# Altium PCB PCB_Interface_Lio.PcbDoc
Units mm, origin at the board's own origin, x right, y up, seen from the top; angles counter-clockwise.
Board outline 75 x 58 mm, 4 copper layers (Top, Layer 2, Layer 3, Bottom Layer 1), stack 0.602 mm thick; 84 components, 48 nets, 226 pads, 112 vias.
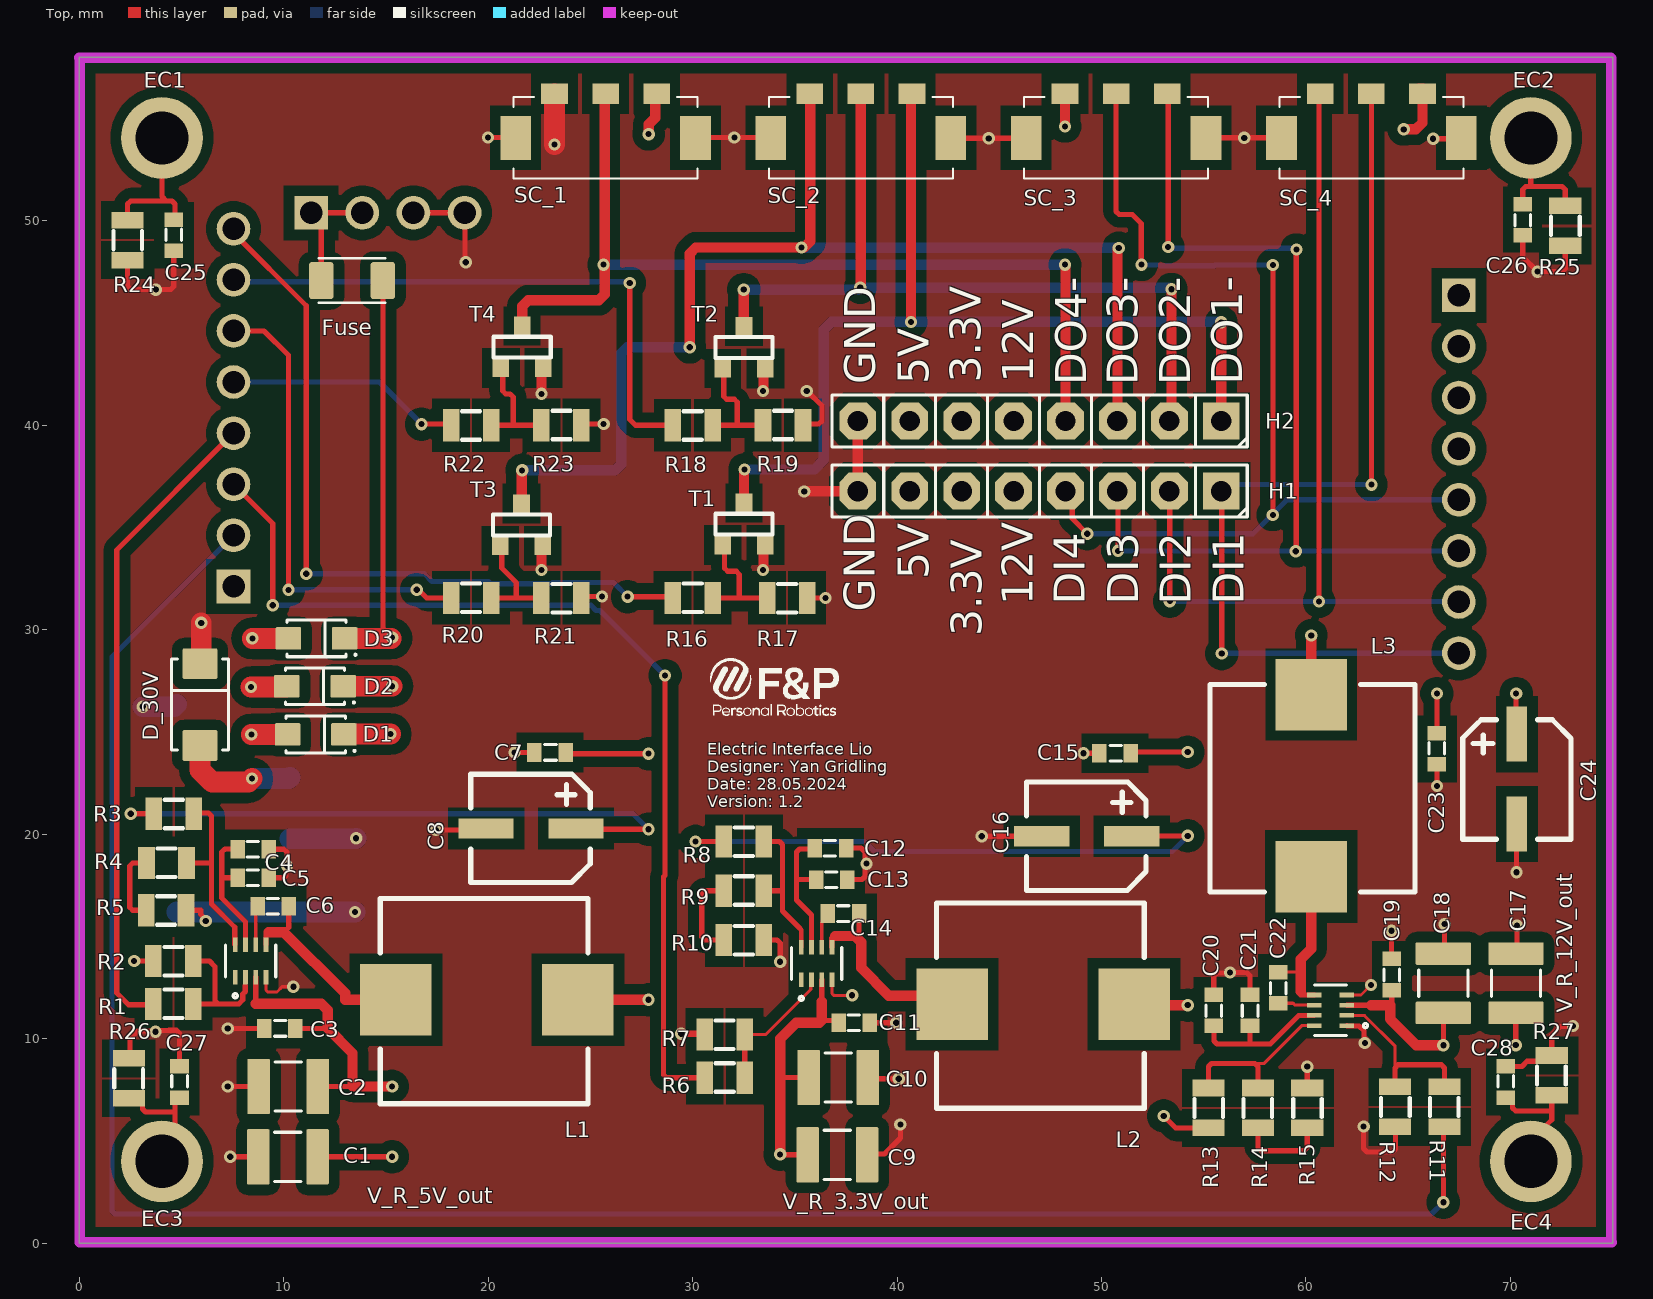
[diagram p0: Top view]
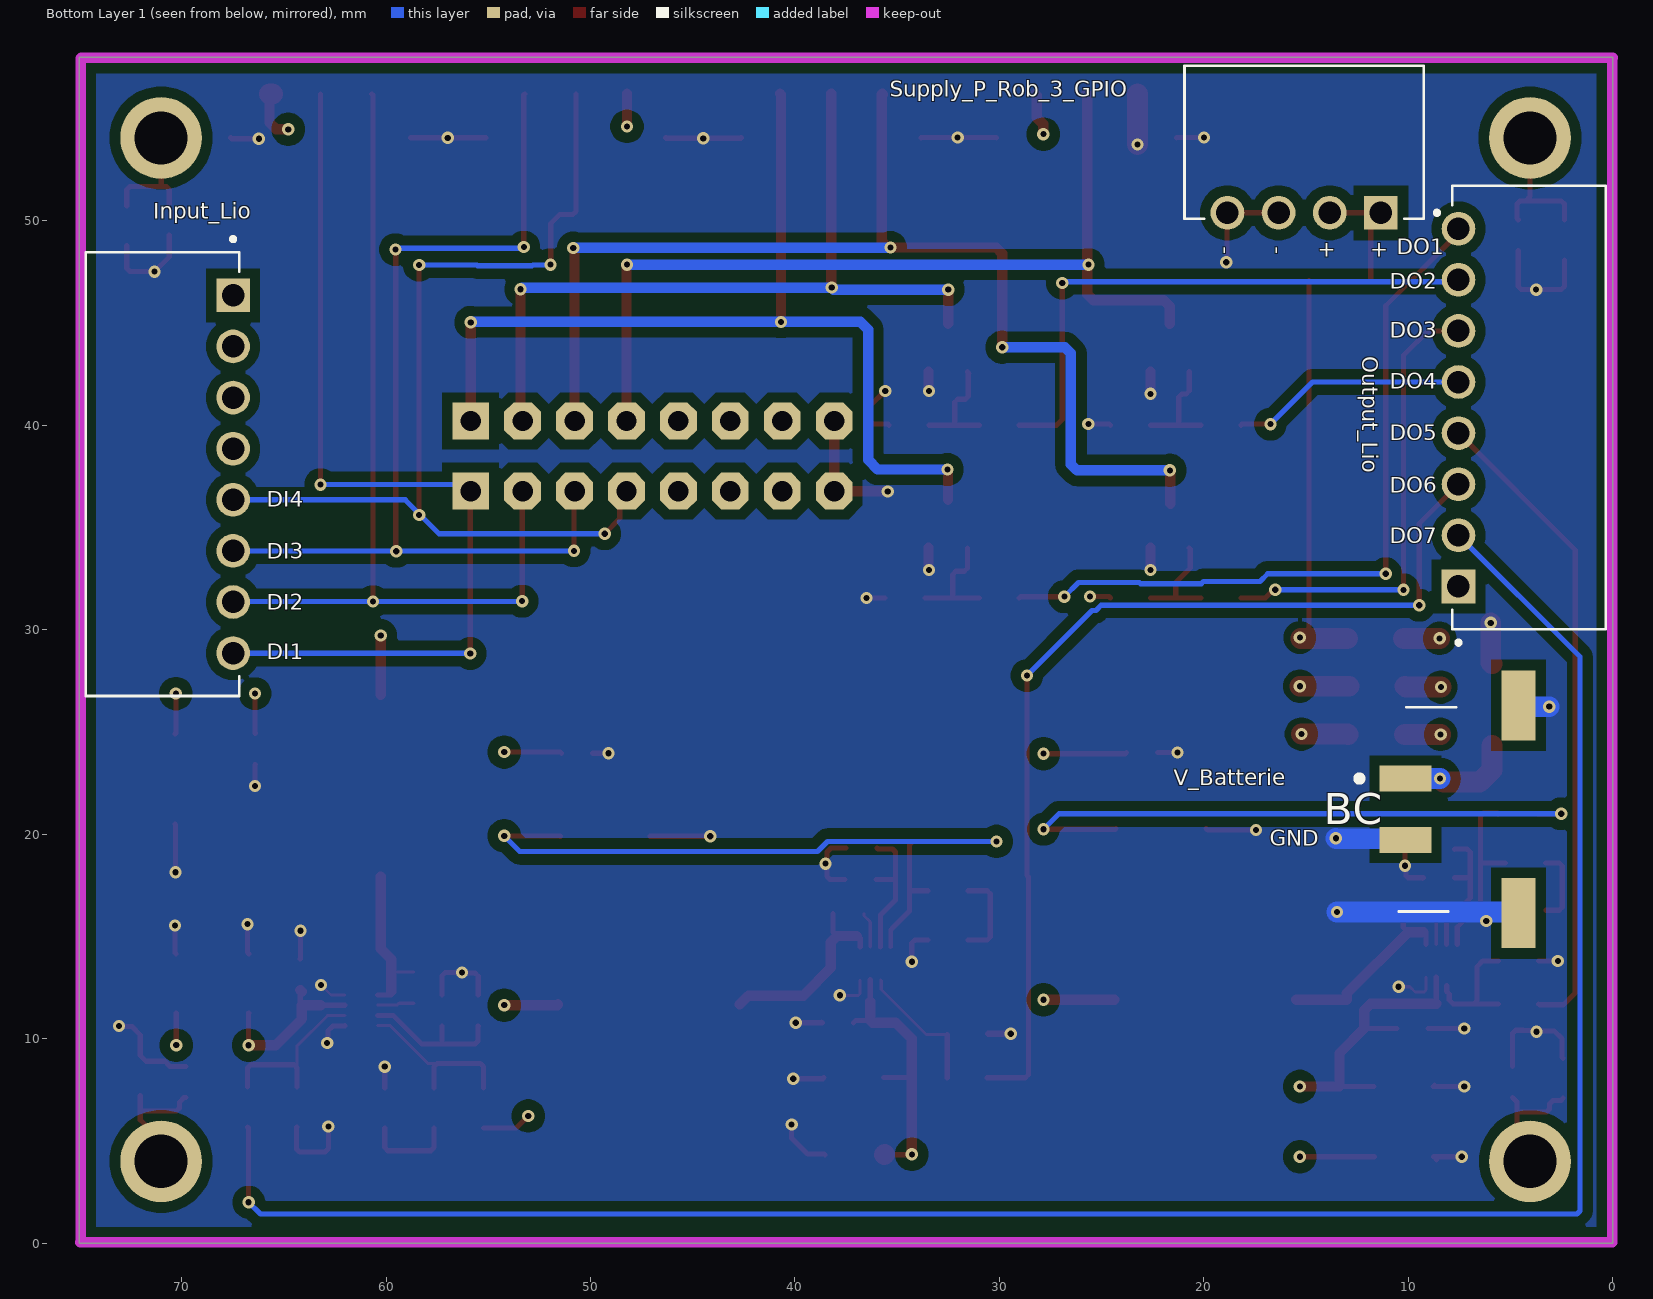
[diagram p1: Bottom Layer 1 view, seen from below]
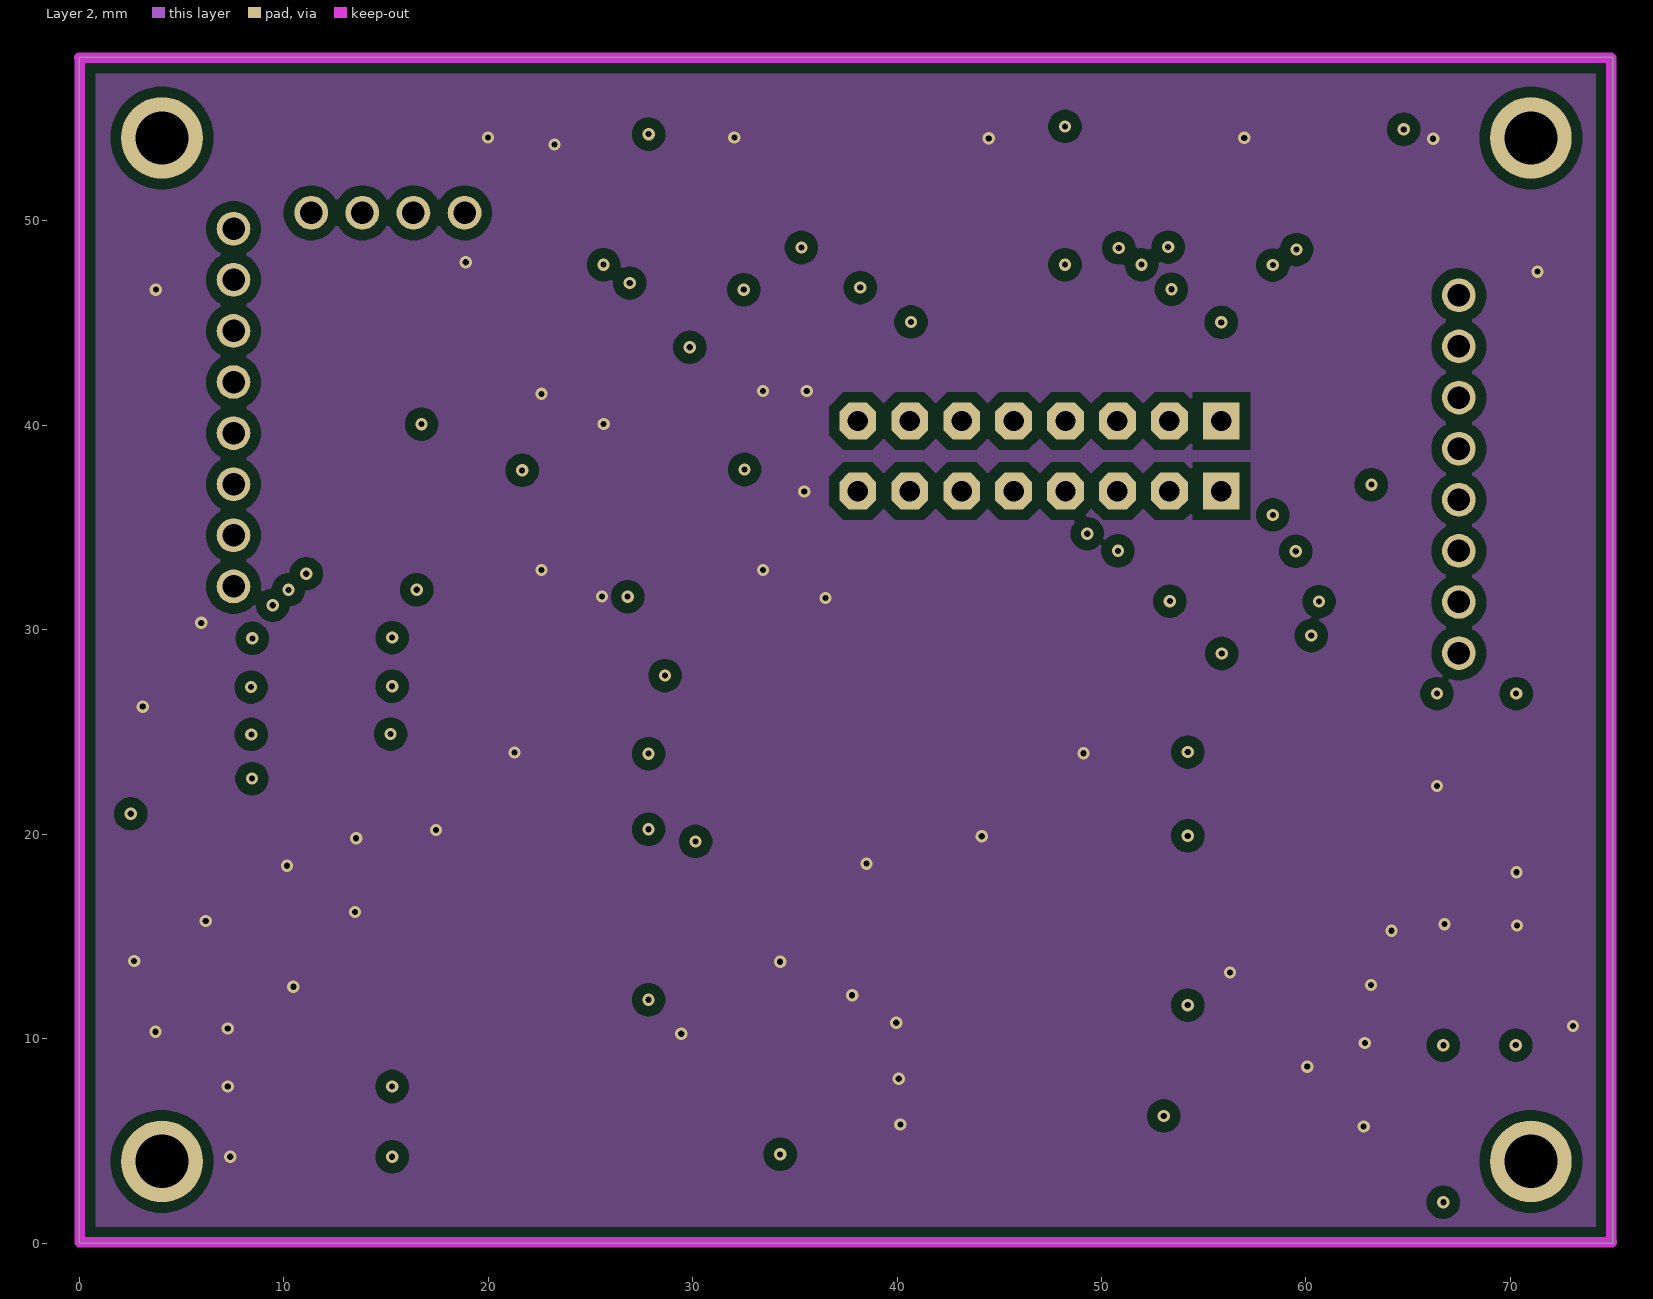
[diagram p2: Layer 2]
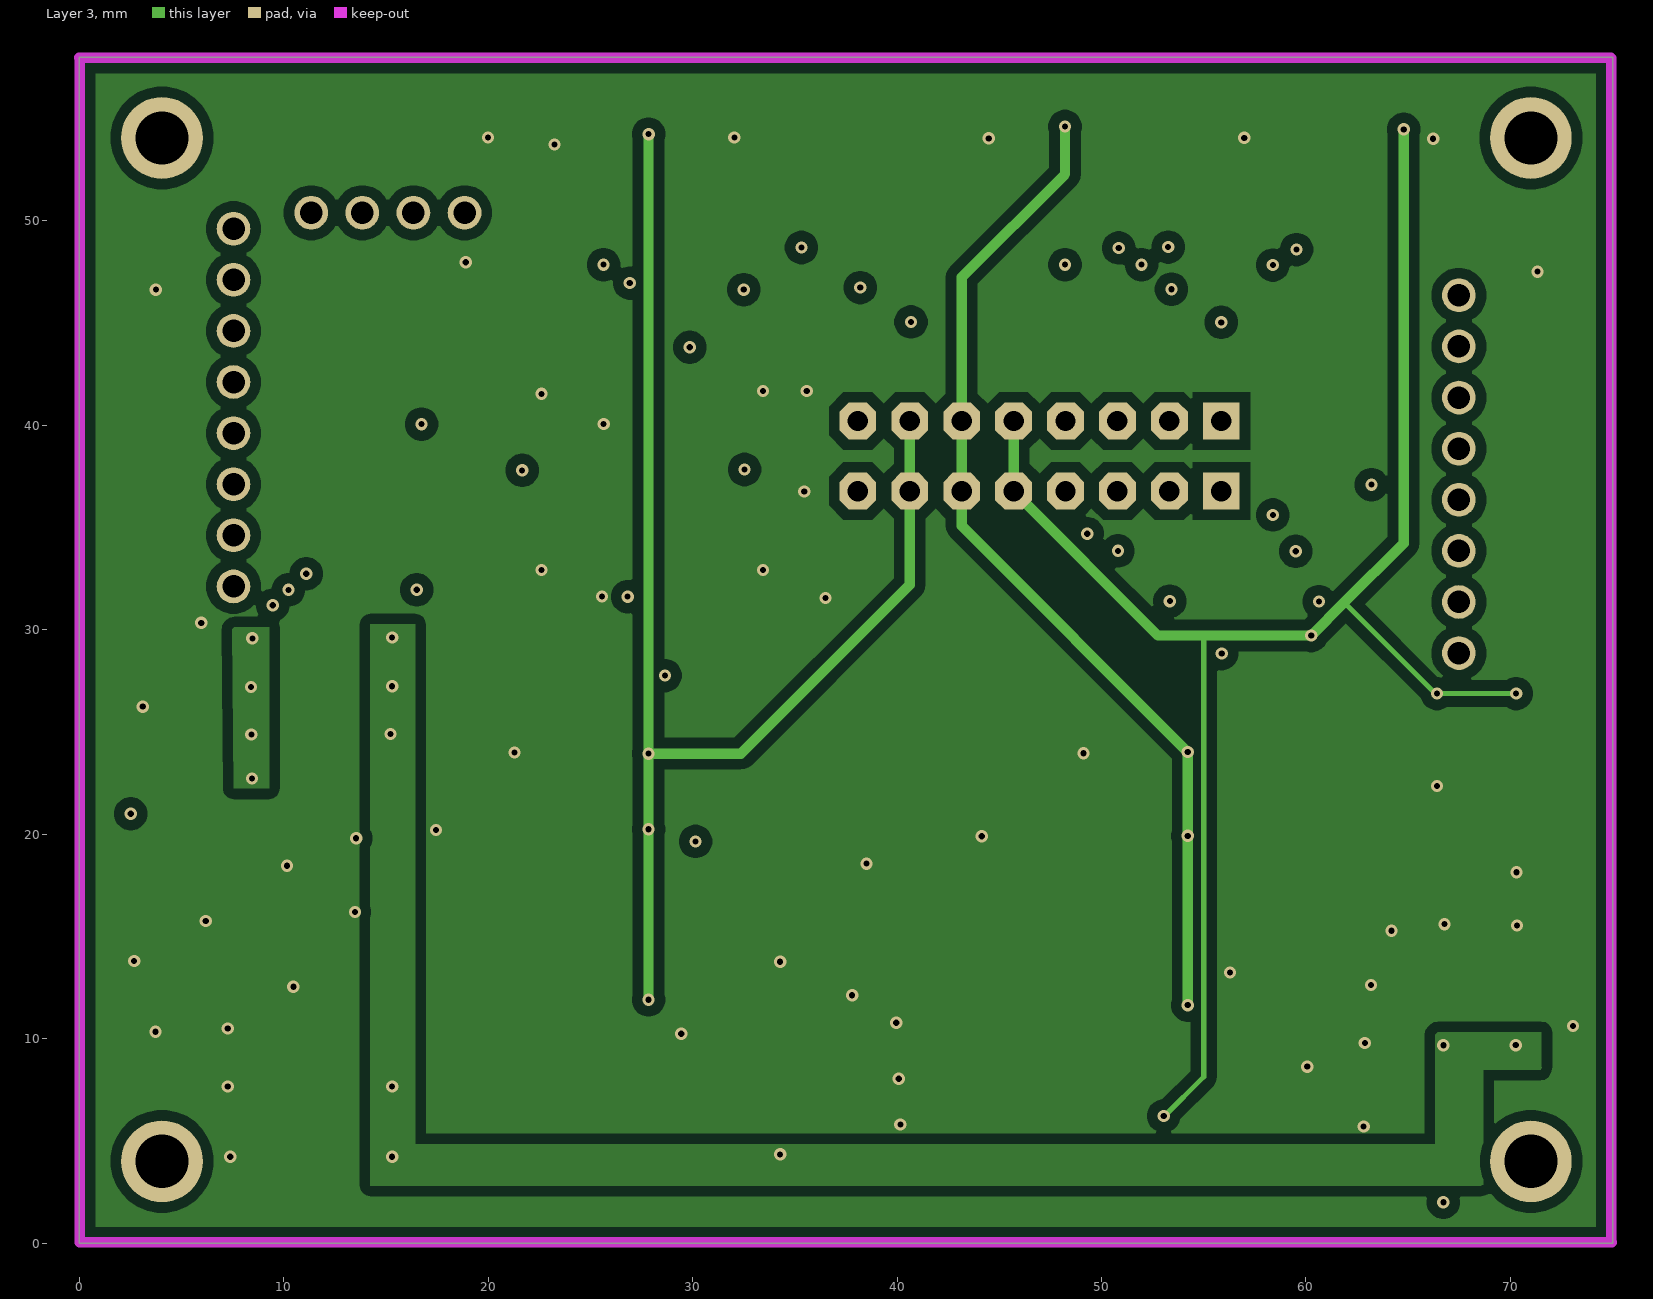
[diagram p3: Layer 3]
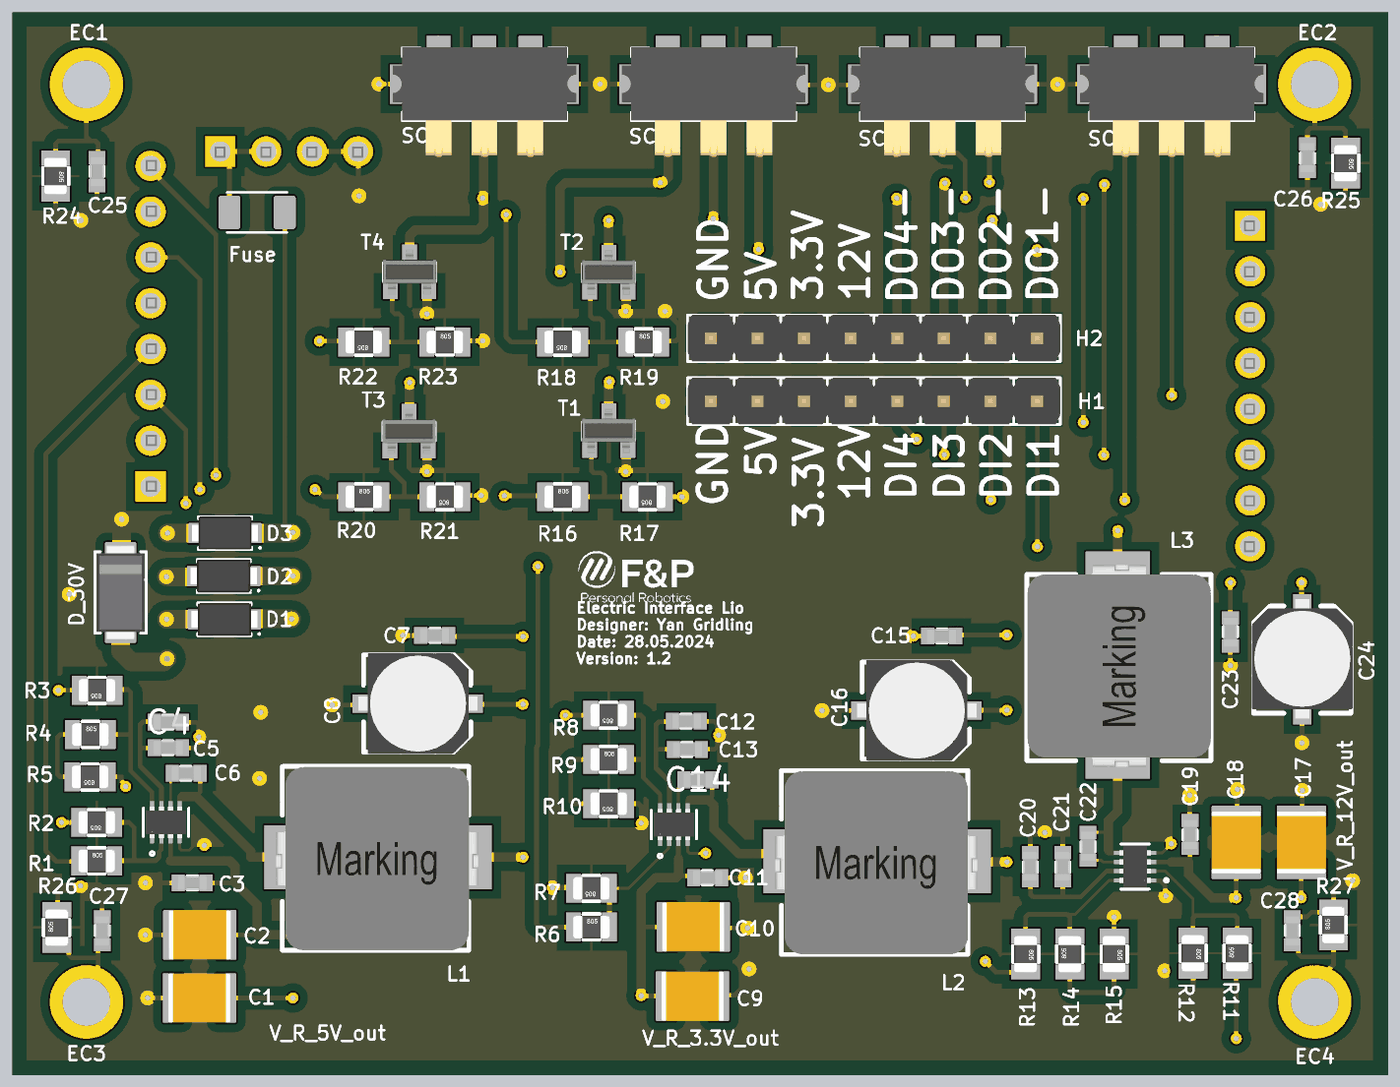
[diagram p4: 3D render of the assembled board from above, using the file's embedded part models]
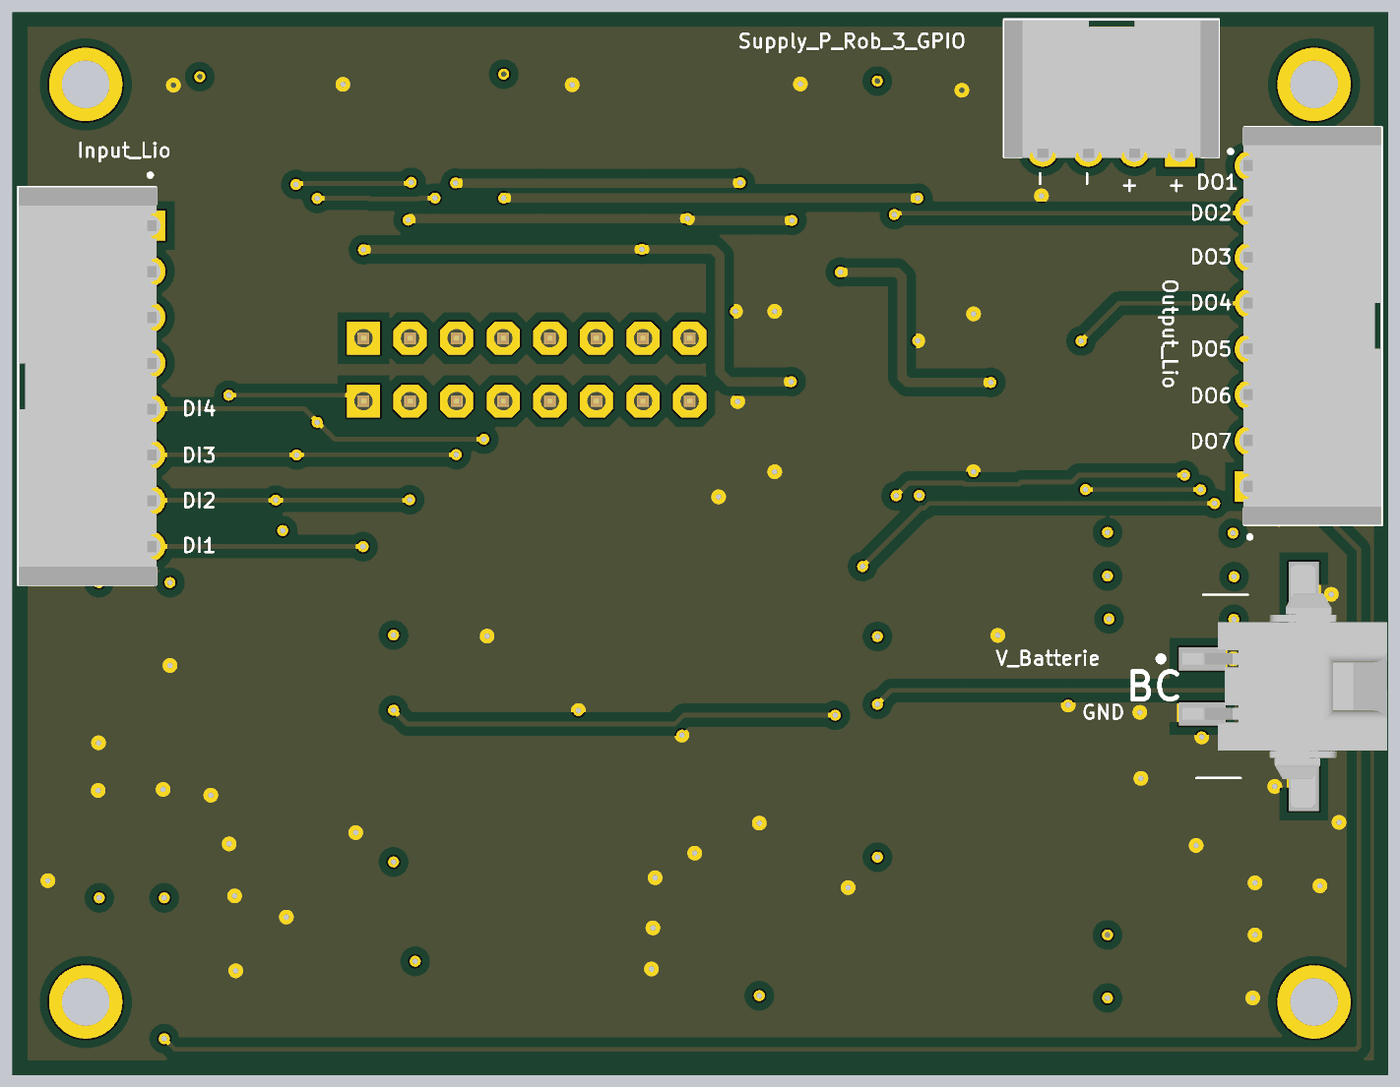
[diagram p5: 3D render of the assembled board from below, using the file's embedded part models]

## Layer stack, top to bottom
Top Solder: solder mask 0.0102, Solder Resist, Dk 3.5
Top: signal copper 0.035
Dielectric 2: prepreg 0.0711, PP-006, Dk 4.1
Layer 2: signal copper 0.035
Dielectric 1: dielectric 0.32, FR-4, Dk 4.8
Layer 3: signal copper 0.035
Dielectric 3: prepreg 0.0711, PP-006, Dk 4.1
Bottom Layer 1: signal copper 0.035
Bottom Solder: solder mask 0.0102, Solder Resist, Dk 3.5

## Board outline
0,0 75,0 75,58 0,58

## Design rules (kind name [scope] priority, off if disabled: settings)
Clearance Clearance_poly [(InPoly)] p1: gap=0.508 ignorepadtopadclearanceinfootprint=FALSE
Clearance Clearance_IC [IsPad AND HasFootprint('LM3150') OR IsPad AND HasFootprint('TSSOP14') OR IsPad AND HasFootprint('LQFP48') OR IsPad AND HasFootprint('SOT363') OR IsPad AND HasFootprint('SOT563') OR IsPad AND  HasFootprint('LQFP64') OR IsPad AND  HasFootprint('MSOP-8') OR IsPad AND HasFootprint('MEC6-130-02-L-D-RA1')] p2: gap=0.152 ignorepadtopadclearanceinfootprint=FALSE
Clearance [All] p3: gap=0.254 ignorepadtopadclearanceinfootprint=FALSE except(0: Arc-Hole Track-Hole SMDPad-Hole THPad-Hole Via-Hole Fill-Hole Poly-Hole Region-Hole Text-Hole)
ComponentClearance [All] p1: gap=0.508 collisioncheckmode=3 verticalgap=0.254 showdistances=FALSE
Height [All] p1: minheight=0 maxheight=38.1 prefheight=25.4
HoleSize [All] p1: absolutevalues=TRUE maxlimit=8.5 minlimit=0.3 maxpercent=80.000 minpercent=20.000
MinimumAnnularRing [All] p1: minimumring=0.15
MinimumSolderMaskSliver [All] p1: minsoldermaskwidth=0.051
PlaneClearance [All] p1: clearance=0.254
PolygonConnect PolygonConnect_via [All vs IsVIa] p1: connectstyle=Direct reliefconductorwidth=0.254 reliefentries=4 polygonreliefangle="90 Angle" airgapwidth=0.254
PolygonConnect [All] p2: connectstyle=NoConnect reliefconductorwidth=0.254 reliefentries=4 polygonreliefangle="90 Angle" airgapwidth=0.508
RoutingVias [All] p1: holewidth=0.3 width=0.5 viastyle="Through Hole" minholewidth=0.254 minwidth=0.381 maxholewidth=0.711 maxwidth=1.27
SilkToSolderMaskClearance SilkscreenOverComponentPads [IsPad] p1: minsilkscreentomaskgap=0 clearancetoexposedcopper=TRUE
SolderMaskExpansion SolderMaskExpansion_fid [HasFootprint('FIDUCIAL_RUND_1.524mm')] p1: expansion=2 istentingtop=FALSE
SolderMaskExpansion SolderMaskExpansion_Vias [(IsVia)] p2: expansion=-0.1 istentingtop=FALSE
SolderMaskExpansion [All] p3: expansion=0.102 istentingtop=FALSE
Width [All] p1: maxlimit=1.016 minlimit=0.152 preferedwidth=0.254 minimp=50.000000 maximp=50.000000 favimp=50.000000
24 further rules are at their usual default settings.

## Components (designator, comment, footprint, x,y, rotation, side; value= is the part's Value field where it differs from the comment)
BC "2-1445100-2" 2-1445100-2 8.537,21.22 r90 bottom
C1 "C 10uF 1210" C_1210_A 10.2,4.22 r180 top value=10uF
C2 "C 10uF 1210" C_1210_A 10.22,7.66 r180 top value=10uF
C3 "C 100nF 0603" 0603 9.8,10.5 r180 top value=100nF
C4 "C 10nF 0603" 0603 8.503,19.265 r0 top value=10nF
C5 "C 10nF 0603" 0603 8.503,17.868 r0 top value=10nF
C6 "C 100nF 0603" 0603 9.48,16.48 r0 top value=100nF
C7 "C 100nF 0603" 0603 23.02,24 r180 top value=100nF
C8 "C 47uF ALUM" HA1C470WR 22.092,20.281 r90 top value=47uF
C9 "C 10uF 1210" C_1210_A 37.08,4.32 r0 top value=10uF
C10 "C 10uF 1210" C_1210_A 37.12,8.1 r0 top value=10uF
C11 "C 100nF 0603" 0603 37.9,10.78 r0 top value=100nF
C12 "C 10nF 0603" 0603 36.74,19.32 r0 top value=10nF
C13 "C 10nF 0603" 0603 36.8,17.78 r0 top value=10nF
C14 "C 100nF 0603" 0603 37.38,16.12 r0 top value=100nF
C15 "C 100nF 0603" 0603 50.66,23.96 r180 top value=100nF
C16 "C 47uF ALUM" HA1C470WR 49.28,19.9 r90 top value=47uF
C17 "C 10uF 1210" C_1210_A 70.274,12.707 r90 top value=10uF
C18 "C 10uF 1210" C_1210_A 66.718,12.707 r90 top value=10uF
C19 "C 100nF 0603" 0603 64.2,13.14 r90 top value=100nF
C20 "C 10nF 0603" 0603 55.488,11.387 r90 top value=10nF
C21 "C 10nF 0603" 0603 57.266,11.387 r90 top value=10nF
C22 "C 100nF 0603" 0603 58.64,12.492 r90 top value=100nF
C23 "C 100nF 0603" 0603 66.4,24.18 r270 top value=100nF
C24 "C 47uF ALUM" HA1C470WR 70.32,22.7 r180 top value=47uF
C25 "C 1uF 0603" 0603 4.62,49.3 r270 top value=1uF
C26 "C 1uF 0603" 0603 70.6,50.06 r90 top value=1uF
C27 "C 1uF 0603" 0603 4.9,7.88 r270 top value=1uF
C28 "C 1uF 0603" 0603 69.78,7.88 r270 top value=1uF
D1 "Schottky 60V/2A" SOD-123FL 11.56,24.88 r180 top
D2 "Schottky 60V/2A" SOD-123FL 11.525,27.24 r180 top
D3 "Schottky 60V/2A" SOD-123FL 11.6,29.58 r180 top
D_30V "SMAJ30CA" SMA 5.9,26.34 r270 top
EC1 "Screw_Earth_Connection" Screw_Earth_Connector_Pad#1 2.008,53.806 r0 top
EC2 "Screw_Earth_Connection" Screw_Earth_Connector_Pad#1 68.968,53.806 r0 top
EC3 "Screw_Earth_Connection" Screw_Earth_Connector_Pad#1 2.008,3.746 r0 top
EC4 "Screw_Earth_Connection" Screw_Earth_Connector_Pad#2 69.028,3.766 r0 top
Fuse "0ZCJ0035AF2E" RESC3216X125N 13.34,47.08 r180 top
H1 "8Pin_Male" Header1x8_254 46.968,36.784 r180 top
H2 "8Pin_Male" Header1x8_254 46.968,40.213 r180 top
Input_Lio "1814906" PHOENIX_1814906 74.68,48.46 r270 bottom
L1 "L 6.8uH 13A" SRP1040VA-6R8M 19.933,11.899 r0 top
L2 "L 6.8uH 13A" SRP1040VA-6R8M 47.14,11.68 r0 top
L3 "L 6.8uH 13A" SRP1040VA-6R8M 60.26,22.38 r90 top
Output_Lio "1814906" PHOENIX_1814906 0.34,30.02 r90 bottom
R1 "R 330K 0805" 0805 4.6,11.7 r0 top value=330k
R2 "R 56K 0805" 0805 4.6,13.8 r180 top value=56k
R3 "R 47K 0805" 0805 4.618,21 r180 top value=47k
R4 "R 6K8 0805" 0805 4.26,18.59 r0 top value=6.8k
R5 "R 2K2 0805" 0805 4.24,16.28 r180 top value=2.2k
R6 "R 330K 0805" 0805 31.568,8.089 r0 top value=330k
R7 "R 56K 0805" 0805 31.56,10.2 r180 top value=56k
R8 "R 22K 0805" 0805 32.506,19.646 r180 top value=22k
R9 "R 5K6 0805" 0805 32.506,17.233 r0 top value=5.6k
R10 "R 1K5 0805" 0805 32.506,14.82 r180 top value=1.5k
R11 "R 330K 0805" 0805 66.775,6.66 r90 top value=330k
R12 "R 56K 0805" 0805 64.362,6.66 r270 top value=56k
R13 "R 100K 0805" 0805 55.234,6.611 r270 top value=100k
R14 "R 5K6 0805" 0805 57.647,6.611 r90 top value=5.6k
R15 "R 1K5 0805" 0805 60.06,6.611 r270 top value=1.5k
R16 "R 330K 0805" 0805 30,31.56 r0 top value=330k
R17 "R 330K 0805" 0805 34.62,31.56 r180 top value=330k
R18 "R 330K 0805" 0805 30,40.005 r180 top value=330k
R19 "R 330K 0805" 0805 34.42,40.005 r0 top value=330k
R20 "R 330K 0805" 0805 19.16,31.56 r0 top value=330k
R21 "R 330K 0805" 0805 23.58,31.56 r180 top value=330k
R22 "R 330K 0805" 0805 19.16,40.005 r180 top value=330k
R23 "R 330K 0805" 0805 23.58,40.005 r0 top value=330k
R24 "R 1M 0805" 0805 2.36,49.06 r270 top value=1M
R25 "R 1M 0805" 0805 72.68,49.76 r270 top value=1M
R26 "R 1M 0805" 0805 2.42,8.06 r90 top value=1M
R27 "R 1M 0805" 0805 72.02,8.2 r90 top value=1M
SC_1 "009155003541006" 009155003541006 25.74,53.14 r0 top
SC_2 "009155003541006" 009155003541006 38.227,53.14 r0 top
SC_3 "009155003541006" 009155003541006 50.713,53.14 r0 top
SC_4 "009155003541006" 009155003541006 63.2,53.14 r0 top
Supply_P_Rob_3_GPIO "1814867" PHOENIX_1814867 9.24,57.6 r0 bottom
T1 "PMV45EN" SOT-23-FET 32.513,35.18 r0 top
T2 "PMV45EN" SOT-23-FET 32.513,43.82 r0 top
T3 "PMV45EN" SOT-23-FET 21.626,35.14 r0 top
T4 "PMV45EN" SOT-23-FET 21.657,43.84 r0 top
V_R_3.3V_out "TPS62933ODRLR" SOT5X3-8_DRL_TEX 36.062,13.677 r90 top
V_R_5V_out "TPS62933ODRLR" SOT5X3-8_DRL_TEX 8.376,13.804 r90 top
V_R_12V_out "TPS62933ODRLR" SOT5X3-8_DRL_TEX 61.203,11.387 r180 top

## Footprints (in the part's own frame and the unit in brackets; to place one, negate y for a bottom-side part, rotate by r counter-clockwise, add the part's x,y. Pads: shape width x height; smd on the part's side, far side on the other; paste and mask are expansions set on the pad)
2-1445100-2 [mm]
  rect 1.27x2.54 smd: 1(1.5,1.6) 2(-1.5,1.6)
  rect 3.43x1.65 smd: 3(5.08,-3.937) 4(-5.08,-3.937)
  silkscreen extent -5,-0.88 5,4, body extent -6.63,-8.49 6.63,2.67, height 5.63
0603 [mil]
  rect 28x36 smd: 1(-30,0) 2(30,0)
  silkscreen extent -12,-15 10,15, body extent -31,-16 32,16, height 12
0805 [mil]
  rect 32x62 smd: 1(-38.5,0) 2(38.5,0)
  silkscreen extent -18,-27 18,28, body extent -39,-25 39,25, height 31
009155003541006 [mm]
  rect 1.3x1 smd: 1(-2.5,3.075) 2(0,3.075) 3(2.5,3.075)
  rect 1.5x2.15 smd: 4(-4.4,0.925) 5(4.4,0.925)
  silkscreen extent -4.5,-1.07 4.5,2.93, body extent -5,-3.05 5,3.45, height 3.8
C_1210_A [mm] "Chip Capacitor, 2-Leads, Body 3.20x2.50mm, IPC High Density"
  rrect10% 1.1x2.7 smd: 1(-1.45,0) 2(1.45,0)
  silkscreen extent -0.65,-1.2 0.65,1.2, body extent -1.7,-1.35 1.7,1.35, height 1.35
HA1C470WR [mm] "PCE4190TR-ND"
  rect 1x2.7 smd: 1(0,-2.2) 2(0,2.2)
  silkscreen extent -2.65,-2.9 2.65,2.95, body extent -2.76,-3.28 2.76,3.23, height 6.15
Header1x8_254 [mm]
  rect 1.8x1.8 hole 1: 1(-8.89,0)
  oct 1.8x1.8 hole 1: 2(-6.35,0) 3(-3.81,0) 4(-1.27,0) 5(1.27,0) 6(3.81,0) 7(6.35,0) 8(8.89,0)
  silkscreen extent -10.16,-1.27 10.16,1.27, body extent -10.16,-1.27 10.16,1.27, height 8.57
PHOENIX_1814867 [mm]
  rect 1.65x1.65 / inner round 1.65 / far side rect 1.65x1.65 hole 1.1: 01(2.1,7.2)
  round 1.65 hole 1.1: 02(4.6,7.2) 03(7.1,7.2) 04(9.6,7.2)
  silkscreen extent -0.75,0 11.7,7.5, body extent -0.02,0.04 11.68,7.83, height 5
PHOENIX_1814906 [mm]
  rect 1.65x1.65 / inner round 1.65 / far side rect 1.65x1.65 hole 1.1: 01(2.1,7.2)
  round 1.65 hole 1.1: 02(4.6,7.2) 03(7.1,7.2) 04(9.6,7.2) 05(12.1,7.2) 06(14.6,7.2) 07(17.1,7.2) 08(19.6,7.2)
  silkscreen extent -0.75,0 21.7,7.5, body extent 0.02,0.04 21.72,7.83, height 5
RESC3216X125N [mm]
  rrect25% 1.2x1.82 smd: 1(-1.505,0) 2(1.505,0)
  silkscreen extent -1.63,-1.09 1.63,1.09
Screw_Earth_Connector_Pad#1 [mm]
  round 4 hole 2.6: 4(2.032,0.254)
Screw_Earth_Connector_Pad#2 [mm]
  round 4 hole 2.6: 4(1.972,0.234)
SMA [mm] "SODFL, 2-Leads, Body 2,67x5,10mm"
  rrect10% 1.5x1.7 smd: A(2,0) K(-2,0)
  silkscreen extent -2.22,-1.4 2.22,1.4, body extent -2.6,-1.3 2.6,1.3, height 2.4
SOD-123FL [mm] "SODFL, 2-Leads, Body 1.65x3.60mm, IPC High Density"
  rrect10% 1.25x1.1 smd: A(1.375,0) K(-1.375,0)
  silkscreen extent -1.95,-0.9 1.45,0.9, body extent -1.8,-0.9 1.8,0.9, height 0.98
SOT5X3-8_DRL_TEX [mil]
  rect 28x9 smd paste+0 mask+0: 1(-31.5,29.54) 2(-31.5,9.85) 3(-31.5,-9.84) 4(-31.5,-29.53) 5(31.5,-29.53) 6(31.5,-9.84) 7(31.5,9.85) 8(31.5,29.54)
  silkscreen extent -71,-48 31,48, body extent -34,-44 34,44, height 24
SOT-23-FET [mil]
  rect 32x36 smd: D(0,40.5) G(-41,-40.5) S(41,-40.5)
  silkscreen extent -55,-20 55,20, body extent -57,-49 58,48, height 39
SRP1040VA-6R8M [mm]
  rect 3.5x3.5 smd: 1(-4.45,0) 2(4.45,0)
  silkscreen extent -5.21,-5.08 4.95,4.95, body extent -5.54,-5.08 5.46,4.92, height 3.81

## Part data
BC: "Micro MATE-N-LOK 2 Position Surface Mount Single Row Straight 3 mm Pin Header", Package=None, Availability=Warning, Check_prices=https://www.snapeda.com/parts/2-1445053-2/TE%20Connectivity%20AMP%20Connectors/view-part/2550164/?ref=eda, MF="TE Connectivity", MP=2-1445053-2, Price=None, Purchase-URL=https://pricing.snapeda.com/search/part/2-1445053-2/?ref=eda, SnapEDA_Link=https://www.snapeda.com/parts/2-1445053-2/TE%20Connectivity%20AMP%20Connectors/view-part/2550164/?ref=snap
C1 C2 C9 C10 C17 C18: library part C_10uF_1210, Supplier Part Number 1=445-7004-1-ND, TempKoeff=X7S, Tolerance=10%, Voltage=50V, Part ID=C_10uF_1210, Price 1pc (CHF)=0.81, Supplier 1=Digi-Key
C3 C6 C7 C11 C14 C15 C19 C22 C23: library part C_100nF_0603, Supplier Part Number 1=1276-1012-1-ND, TempKoeff=Y5V, Tolerance=-20%/+80%, Voltage=50V, Part ID=C_100nF_0603, Price 1pc (CHF)=0.1, Supplier 1=Digi-Key
C4 C5 C12 C13 C20 C21: library part C_10000pF_0603, Supplier Part Number 1=1276-1009-1-ND, TempKoeff=X7R, Tolerance=10%, Voltage=50V, Part ID=C_10000pF_0603, Price 1pc (CHF)=0.10, Supplier 1=Digi-Key
C8 C16 C24: library part C_47uF_ALUM, Supplier Part Number 1=PCE4190TR-ND, Tolerance=20%, Voltage=16V, Part ID=C_47uF_ALUM, Price 1pc (CHF)=0.08, Supplier 1=Digi-Key
C25 C26 C27 C28: library part C_1uF_0603, Supplier Part Number 1=1276-6617-1-ND, TempKoeff=X7R, Tolerance=10%, Voltage=25V, Part ID=C_1uF_0603, Price 1pc (CHF)=0.29, Supplier 1=Digi-Key
D1 D2 D3: library part D_NTS260ESF, Current=2A, Forward Voltage=550mV@2A, Supplier Part Number 1=RBR2MM60CTR-ND, Voltage=60V, ComponentLink1Description=Datasheet, ComponentLink1URL=https://www.onsemi.com/pub/Collateral/NTS260ESF-D.PDF, Part ID=D_NTS260ESF, Price 10pcs=0.364, Supplier 1=Digi-Key
D_30V: library part D_SMAJ30CA, "Cera Diode 30 Volt Overvoltage protection.", Current=4.1A, Supplier Part Number 1=SMAJ30CALFCT-ND, Voltage=30V, ComponentLink1Description=Datasheet, ComponentLink1URL=https://www.littelfuse.com/~/media/electronics/datasheets/tvs_diodes/littelfuse_tvs_diode_smaj_datasheet.pdf.pdf, Part ID=D_SMAJ30CA, Price 10pcs=0.357, Supplier 1=Digi-Key
Fuse: "1206 SMT PPTC", Package="1206 Bel Fuse", ComponentLink1Description=https://www.mouser.ch/ProductDetail/Bel-Fuse/0ZCJ0035AF2E?qs=SRYZG9HaIQ1eeV%2FMwyYkuw%3D%3D, MF="Bel Fuse", MP=0ZCJ0035AF2E, SnapEDA_Link=https://www.snapeda.com/parts/0ZCJ0035AF2E/Bel%20Fuse%20Inc./view-part/703881/?ref=snap
H1 H2: library part ArduinoConnector_8, Supplier Part Number 1=732-5321-ND, ComponentLink1Description=Datasheet, ComponentLink1URL=https://katalog.we-online.de/em/datasheet/6130xx11121.pdf, Part ID=ArduinoConnector_8, Price 1pc (CHF)=0.36, Supplier 1=Digi-Key
Input_Lio Output_Lio: Package=None, Availability=Unavailable, ComponentLink1Description=https://www.phoenixcontact.com/en-us/products/pcb-header-ptsm-05-8-hh-25-thr-wh-r44-1814906, MF="{'manufacturer': u'Phoenix Contact'}", MP=1814906, Price=None
L1 L2 L3: library part SRP1040VA-6R8M, ComponentLink1Description=https://www.bourns.com/docs/product-datasheets/srp1040va.pdf
R1 R6 R11 R16 R17 R18 R19 R20 R21 R22 R23: library part R_330k_0805, Power Dissipation=125mW, Supplier Part Number 1=311-330KCRCT-ND, Tolerance=1%, Part ID=R_330k_0805, Price 10pcs (CHF)=0.042, Supplier 1=Digi-Key
R2 R7 R12: library part R_56k_0805, Power Dissipation=125mW, Supplier Part Number 1=311-56.0KCRCT-ND, Tolerance=1%, Part ID=R_56k_0805, Price 10pcs (CHF)=0.045, Supplier 1=Digi-Key
R3: library part R_47k_0805, Power Dissipation=125mW, Supplier Part Number 1=A106064CT-ND, Tolerance=1%, Part ID=R_47k_0805, Price 10pcs (CHF)=0.09, Supplier 1=Digi-Key
R4: library part R_6k8_0805, Power Dissipation=125mW, Supplier Part Number 1=A126384CT-ND, Tolerance=1%, Part ID=R_6k8_0805, Price 10pcs (CHF)=0.068, Supplier 1=Digi-Key
R5: library part R_2k2_0805, Power Dissipation=125mW, Supplier Part Number 1=311-2.20KCRCT-ND, Tolerance=1%, Part ID=R_2k2_0805, Price 10pcs (CHF)=0.043, Supplier 1=Digi-Key
R8: library part R_22k_0805, Power Dissipation=125mW, Supplier Part Number 1=311-22.0KCRCT-ND, Tolerance=1%, Part ID=R_22k_0805, Price 10pcs (CHF)=0.042, Supplier 1=Digi-Key
R9 R14: library part R_5k6_0805, Power Dissipation=125mW, Supplier Part Number 1=A126380CT-ND, Tolerance=1%, Part ID=R_5k6_0805, Price 10pcs (CHF)=0.051, Supplier 1=Digi-Key
R10 R15: library part R_1k5_0805, Power Dissipation=250mW, Supplier Part Number 1=RNCP0805FTD1K50CT-ND, Tolerance=1%, Part ID=R_1k5_0805, Price 10pcs (CHF)=0.072, Supplier 1=Digi-Key
R13: library part R_100k_0805, Power Dissipation=125mW, Supplier Part Number 1=311-100KCRCT-ND, Tolerance=1%, Part ID=R_100k_0805, Price 10pcs (CHF)=0.042, Supplier 1=Digi-Key
R24 R25 R26 R27: library part R_1M_0805, Power Dissipation=125mW, Supplier Part Number 1=311-1.00MCRCT-ND, Tolerance=1%, Part ID=R_1M_0805, Price 10pcs (CHF)=0.042, Supplier 1=Digi-Key
SC_1 SC_2 SC_3 SC_4: "Connector", Manufacturer_Name="Kyocera AVX", Mouser Part Number=581-009155003541006, Arrow Part Number=009155003541006, Arrow Price/Stock=https://www.arrow.com/en/products/009155003541006/avx, Datasheet Link=http://www.mouser.com/datasheet/2/40/RightAngle2.5mmPitch_9155-500-845733.pdf, Height=4mm, Manufacturer_Part_Number=009155003541006, Mouser Price/Stock=https://www.mouser.co.uk/ProductDetail/AVX/009155003541006?qs=aTQdX%252BfNGTp5QwJ6nid1rw%3D%3D
Supply_P_Rob_3_GPIO: "Pluggable Header 2.5mm 20AWG 160V 6A 4 Position COMBICON PTSM Series", Package=None, Check_prices=https://www.snapeda.com/parts/1814867/Phoenix+Contact/view-part/?ref=eda, ComponentLink1Description=https://www.phoenixcontact.com/en-us/products/pcb-header-ptsm-05-4-hh-25-thr-wh-r32-1814867, MF="Phoenix Contact", MP=1814867, SnapEDA_Link=https://www.snapeda.com/parts/1814867/Phoenix+Contact/view-part/?ref=snap
T1 T2 T3 T4: library part FET_N_CH_PMV45EN, Current=4.1A, Power Dissipation=510mW, Supplier Part Number 1=1727-2307-1-ND, Voltage=30V, ComponentLink1Description=Datasheet, ComponentLink1URL=https://assets.nexperia.com/documents/data-sheet/PMV45EN2.pdf, Part ID=FET_N_CH_PMV45EN, Price 1pc (CHF)=0.44, Supplier 1=Digi-Key
V_R_3.3V_out V_R_5V_out V_R_12V_out: "Buck Converter", ComponentLink1Description=https://eu.mouser.com/ProductDetail/Texas-Instruments/TPS62933ODRLR?qs=By6Nw2ByBD3VuSv7z7GudQ%3D%3D

## Via types
v1: diameter 0.6, hole 0.3, Top to Bottom Layer 1, 112 vias

## Nets (pads, with @x,y where several pads share a name; then routed paths per layer and width w, separated by ;. In a path a pad name is that pad's centre, name@x,y a point inside that pad or via, vN(x,y) a via of type N, cw(c..) or ccw(c..) an arc to the next point about the centre after c; other vN are vias at no path point)
3.3VDC: C15.1 C16.1 H1.6 H2.6 L2.2 R8.2 SC_3.1 | length 85.5
  Top w0.254: v1(30.14,19.646) R8.2 ; C15.1 51.482,24.02 v1(54.22,24.02) ; C16.1 51.5,19.92 v1(54.22,19.92)
  Top w0.508: v1(48.213,54.62) SC_3.1 ; L2.2 51.63,11.64 v1(54.22,11.64)
  Layer 3 w0.508: v1(48.213,54.62) 48.213,52.293 43.158,47.238 H2.6 H1.6 43.158,35.082 v1(54.22,24.02) v1(54.22,19.92) v1(54.22,11.64)
  Bottom Layer 1 w0.254: v1(30.14,19.646) 38.406,19.646 38.892,19.16 53.46,19.16 v1(54.22,19.92)
5VDC: C7.1 C8.1 H1.7 H2.7 L1.2 R3.2 SC_1.3 | length 106.6
  Top w0.254: v1(2.51,21) R3.2 ; C7.1 23.842,23.94 v1(27.84,23.94) ; C8.1 24.333,20.24 v1(27.84,20.24)
  Top w0.508: L1.2 L1.2 v1(27.84,11.9) ; v1(27.845,54.245) 27.845,54.725 28.16,55.04 28.16,56.135 SC_1.3
  Layer 3 w0.508: v1(27.84,11.9) v1(27.84,20.24) v1(27.84,23.94) ; v1(27.845,54.245) 27.84,54.24 v1(27.84,23.94) ; H2.7 H1.7 40.618,32.198 32.36,23.94 v1(27.84,23.94)
  Bottom Layer 1 w0.254: v1(2.51,21) 27.08,21 v1(27.84,20.24)
12VDC: C23.1 C24.1 H1.5 H2.5 L3.2 R13.2 SC_4.3 | length 94
  Top w0.254: v1(53.04,6.22) 53.627,5.633 R13.2 ; C23.1 66.405,24.947 v1(66.405,26.88) ; v1(70.28,26.88) 70.28,24.94 C24.1
  Top w0.508: L3.2 v1(60.26,29.72) ; v1(64.78,54.48) 65.38,54.48 65.7,54.8 SC_4.3
  Top w1.016: SC_4.3@65.558,56.207 65.566,56.215 SC_4.3
  Layer 3 w0.254: v1@53.08,6.22 55,8.14 55,29.72 ; 61.88,31.34 61.88,31.32 66.32,26.88 v1(66.405,26.88) v1(70.28,26.88)
  Layer 3 w0.508: H2.5 H1.5 52.762,29.72 55,29.72 v1(60.26,29.72) 61.88,31.34 64.78,34.24 v1(64.78,54.48)
GND: BC.2 BC.3 BC.4 C1.2 C2.2 C3.2 C4.2 C5.2 C7.2 C8.2 C9.2 C10.2 C11.2 C12.2 C13.2 C15.2 C16.2 C17.2 C18.2 C19.2 C20.2 C21.2 C23.2 C24.2 C25.2 C26.1 C27.1 C28.1 D_30V.K H1.8 H2.8 R2.2 R5.1 R7.2 R10.1 R12.2 R15.1 R17.1 R19.2 R21.1 R23.2 R24.2 R25.2 R26.2 R27.2 SC_1.1 SC_1.4 SC_1.5 SC_2.4 SC_2.5 SC_3.4 SC_3.5 SC_4.4 SC_4.5 Supply_P_Rob_3_GPIO.03 Supply_P_Rob_3_GPIO.04 T1.S T2.S T3.S T4.S V_R_3.3V_out.4 V_R_5V_out.4 V_R_12V_out.1 V_R_12V_out.4 | length 125.5
  Top w0.152: V_R_5V_out.4 9.126,12.373 9.215,12.284 9.666,12.284 9.922,12.54 v1(10.467,12.54) ; R7.2@30.542,10.24 R7.2 ; V_R_3.3V_out.4 36.812,12.205 36.901,12.115 37.795,12.115 v1(37.8,12.12) ; V_R_12V_out.4 62.691,12.137 v1(63.18,12.626)
  Top w0.254: R24.2 2.36,46.789 2.509,46.64 v1(3.74,46.64) 4.471,46.64 4.62,46.789 C25.2 ; R26.2 2.48,9.098 2.48,10 2.853,10.373 3.039,10.373 3.687,10.373 v1(3.72,10.34) 3.786,10.406 4.388,10.406 4.39,10.409 4.751,10.409 4.9,10.26 C27.1 ; v1(2.68,13.8) R2.2 ; R5.1@5.218,16.039 R5.1 5.94,16.28 5.94,16.067 6.18,15.827 v1(6.18,15.76) ; v1(7.258,7.66) C2.2 C2.2@8.71,7.72 ; v1@7.271,10.486 v1(7.258,10.5) C3.2 ; v1(7.38,4.22) C1.2 C1.2@8.61,4.08 ; C4.2 10.011,19.265 10.16,19.116 v1(10.16,18.46) 10.113,18.413 10.113,17.97 10.011,17.868 C5.2 C5.2@9.293,17.84 ; Supply_P_Rob_3_GPIO.03 Supply_P_Rob_3_GPIO.04 18.87,50.37 18.87,48.01 v1(18.9,47.98) ; v1(17.44,20.204) 19.815,20.204 C8.2 ; v1(19.985,54.08) 21.325,54.08 SC_1.4 ; v1(21.28,24) C7.2 ; R21.1 24.63,31.632 v1(25.559,31.632) ; R23.2 24.624,40.071 v1(25.644,40.071) ; SC_1.5 30.155,54.08 33.812,54.08 SC_2.4 ; R10.1 34.131,14.82 34.28,14.671 v1(34.28,13.76) ; R19.2 35.453,40.06 36.171,40.06 36.32,40.209 36.32,40.96 35.6,41.68 v1(35.58,41.68) ; R17.1 v1(36.5,31.56) ; C12.2 38.239,19.32 38.434,19.125 38.434,18.626 v1(38.5,18.56) 38.434,18.494 38.434,17.934 38.28,17.78 C13.2 ; C9.2 38.57,4.36 39.38,4.36 40.16,5.14 v1(40.16,5.8) ; C10.2 38.63,8.04 v1(40.08,8.04) ; C11.2@38.702,10.82 C11.2 v1(39.96,10.78) ; SC_2.5 42.652,54.04 v1(44.48,54.04) 46.288,54.04 SC_3.4 ; v1(44.14,19.9) C16.2 ; v1(49.12,23.96) C15.2 ; SC_3.5 SC_4.4 ; C20.2 55.488,13.051 55.649,13.212 56.252,13.212 v1(56.28,13.24) 57.1,13.24 57.266,13.074 C21.2 ; R15.1 v1(60.06,8.631) ; V_R_12V_out.1 62.016,10.624 62.596,10.624 62.833,10.387 62.833,9.833 v1(62.88,9.786) ; v1(62.82,5.7) 62.82,4.629 62.989,4.46 64.231,4.46 64.38,4.609 64.38,5.664 R12.2 ; v1(64.18,15.28) 64.18,13.922 C19.2 ; v1(66.22,54.02) 67.555,54.02 SC_4.5 ; C23.2 66.405,23.413 v1(66.405,22.36) ; C18.2 66.78,14.219 v1(66.78,15.6) ; C28.1 70.562,8.642 70.818,8.898 71.741,8.898 R27.2 72.02,10.18 72.429,10.589 73.029,10.589 v1(73.06,10.62) ; C17.2 70.32,14.203 v1(70.32,15.54) ; v1(70.3,18.14) 70.3,20.48 C24.2 ; C26.1 70.6,48.24 v1(71.32,47.52) 72.531,47.52 72.68,47.669 R25.2
  Top w0.304: v1(29.44,10.24) R7.2@30.542,10.24
  Top w0.508: v1(22.602,41.54) 22.607,41.545 T4.S@22.607,42.625 ; v1(22.607,32.929) T3.S@22.607,34.004 ; v1(33.44,32.929) 33.463,32.952 T1.S@33.463,34.004 ; v1(33.44,41.68) 33.463,41.703 T2.S@33.463,42.625 ; v1(35.46,36.76) 35.484,36.784 H1.8 H2.8
  Top w1.016: D_30V.K 5.96,28.4 v1(5.96,30.338) ; v1(23.24,53.74) SC_1.1
  Bottom Layer 1 w1.016: v1(3.1,26.24) 4.643,26.24 BC.3@4.763,26.36 ; BC.4@4.763,16.2 v1(13.48,16.2) ; BC.2@10.3,19.78 13.52,19.78 v1(13.54,19.8)
  other v1: 32.04,54.08 56.98,54.065
NetBC_1: BC.1 D1.A D2.A D3.A D_30V.A | length 11.2
  Top w1.016: D_30V.A 5.9,23.145 6.495,22.549 8.269,22.549 v1(8.44,22.72) ; v1(8.4,27.2) 10.11,27.2 D2.A ; v1(8.412,24.88) D1.A ; v1(8.46,29.58) D3.A
  Bottom Layer 1 w1.016: v1(8.44,22.72) 10.24,22.72 BC.1@10.3,22.78
NetC4_1: C4.1 C5.1 V_R_5V_out.7 | length 6.6
  Top w0.254: C5.1 6.968,17.868 ; C4.1 7.726,19.28 7.117,19.28 6.968,19.131 6.968,17.868 ; V_R_5V_out.7 8.126,15.72 6.968,16.878 6.968,17.868
NetC6_1: C6.1 V_R_5V_out.6 | length 1.9
  Top w0.152: V_R_5V_out.6 8.626,16.388 C6.1
NetC6_2: C6.2 L1.1 V_R_5V_out.5 | length 9.8
  Top w0.254: V_R_5V_out.5 9.126,15.214 ; 10.002,15.214 10.242,15.453 C6.2
  Top w0.508: 9.265,15.214 10.002,15.214 13.001,12.215 13.001,11.899 L1.1
NetC12_1: C12.1 C13.1 V_R_3.3V_out.7 | length 6.9
  Top w0.254: V_R_3.3V_out.7 35.817,14.482 35.817,16.043 35.08,16.78 35.08,17.78 ; C12.1 35.938,19.28 35.229,19.28 35.08,19.131 35.08,17.78 ; C13.1 35.08,17.78
NetC14_1: C14.1 V_R_3.3V_out.6 | length 1.8
  Top w0.152: V_R_3.3V_out.6 36.312,15.712 36.618,16.018 C14.1
NetC14_2: C14.2 L2.1 V_R_3.3V_out.5 | length 9.5
  Top w0.254: 36.807,14.92 36.807,14.482 V_R_3.3V_out.5 ; 37.942,15.02 38.142,15.22 C14.2
  Top w0.508: 36.96,15.02 37.942,15.02 38.24,14.722 38.24,13.46 39.6,12.1 42.27,12.1 L2.1
NetC20_1: C20.1 C21.1 V_R_12V_out.7 | length 7.2
  Top w0.254: C20.1 55.5,10.613 55.5,9.889 55.649,9.74 57.24,9.74 ; C21.1 57.266,9.766 57.24,9.74 ; V_R_12V_out.7 59.649,11.137 58.252,9.74 57.24,9.74
NetC22_1: C22.1 V_R_12V_out.6 | length 1.8
  Top w0.152: C22.1 59.373,11.73 59.465,11.637 V_R_12V_out.6
NetC22_2: C22.2 L3.1 V_R_12V_out.5 | length 7.6
  Top w0.152: C22.2 59.734,13.254 59.74,13.26
  Top w0.254: 59.74,12.137 V_R_12V_out.5
  Top w0.508: 59.74,12.32 59.74,13.26 59.74,13.88 60.26,14.4 L3.1
NetC25_1: C25.1 EC1.4 R24.1 | length 7.2
  Top w0.254: R24.1 2.36,50.831 2.509,50.98 4.249,50.98 ; EC1.4 4.04,51.189 4.249,50.98 ; C25.1 4.68,50.122 4.68,50.831 4.531,50.98 4.249,50.98
NetC26_2: C26.2 EC2.4 R25.1 | length 6.1
  Top w0.254: C26.2 70.6,51.53 70.749,51.679 71,51.679 ; EC2.4 71,51.679 ; R25.1 72.68,51.531 72.531,51.68 71.987,51.68 71.986,51.679 71,51.679
NetC27_2: C27.2 EC3.4 R26.1 | length 6.2
  Top w0.254: R26.1 2.529,6.973 2.91,6.973 3.08,6.803 3.08,6.56 3.229,6.412 4.68,6.412 ; EC3.4 4.68,4.64 4.68,6.412 ; C27.2 4.68,6.898 4.68,6.412
NetC28_2: C28.2 EC4.4 R27.1 | length 6.3
  Top w0.254: C28.2 69.882,7.118 70.11,6.889 70.11,6.609 70.259,6.46 72.02,6.46 ; EC4.4 71,5.014 72.02,6.034 72.02,6.46 ; R27.1 72.02,6.46
NetFuse_2: Fuse.2 Supply_P_Rob_3_GPIO.01 Supply_P_Rob_3_GPIO.02 | length 6
  Top w0.254: Fuse.2 11.835,49.905 Supply_P_Rob_3_GPIO.01 Supply_P_Rob_3_GPIO.02
NetH1_1: H1.1 Input_Lio.08 SC_4.2 | length 46.1
  Top w0.254: H1.1 55.88,36.762 v1(55.88,28.84) ; v1(63.2,37.1) SC_4.2
  Bottom Layer 1 w0.254: H1.1 56.174,37.1 v1(63.2,37.1) ; v1(55.88,28.84) 55.89,28.85 67.47,28.85 Input_Lio.08
NetH1_2: H1.2 Input_Lio.07 SC_4.1 | length 44.4
  Top w0.254: H1.2 53.34,36.762 v1(53.34,31.4) ; v1(60.64,31.38) 60.64,56.155 SC_4.1
  Bottom Layer 1 w0.254: v1(53.34,31.4) 53.36,31.38 v1(60.64,31.38) 67.46,31.38 Input_Lio.07
NetH1_3: H1.3 Input_Lio.06 SC_3.3 | length 48.2
  Top w0.254: H1.3 50.8,36.762 v1(50.8,33.86) ; SC_3.3 53.26,56.168 v1(53.26,48.72) ; v1(59.5,33.84) 59.52,33.86 59.52,48.58 v1(59.54,48.6)
  Bottom Layer 1 w0.254: v1(50.8,33.86) Input_Lio.06 ; v1(53.26,48.72) 53.32,48.66 59.48,48.66 v1(59.54,48.6)
NetH1_4: H1.4 Input_Lio.05 SC_3.2 | length 49.3
  Top w0.254: H1.4 48.564,36.458 48.564,35.436 v1(49.3,34.7) ; SC_3.2 50.713,50.469 50.862,50.32 51.5,50.32 51.94,49.88 51.94,47.88 v1(51.96,47.86) ; v1(58.38,35.62) v1(58.38,47.84)
  Bottom Layer 1 w0.254: v1(49.3,34.7) 57.404,34.7 59.064,36.36 Input_Lio.05 ; v1(51.96,47.86) 51.97,47.85 52.809,47.85 52.853,47.806 55.514,47.806 55.559,47.85 58.37,47.85 v1(58.38,47.84)
NetH2_1: H2.1 SC_2.3 T1.D | length 47.5
  Top w0.508: T1.D@32.513,36.354 32.513,37.813 v1(32.54,37.84) ; v1(40.68,45.06) 40.68,56.168 SC_2.3 ; H2.1 v1(55.858,45.04)
  Bottom Layer 1 w0.508: v1(32.54,37.84) 35.942,37.84 36.418,38.316 36.418,44.68 36.798,45.06 v1(40.68,45.06) 55.838,45.06 v1(55.858,45.04)
NetH2_2: H2.2 SC_2.2 T2.D | length 38.6
  Top w0.508: v1(32.5,46.64) 32.5,44.988 T2.D@32.513,44.975 ; v1(38.2,46.74) 38.227,46.767 SC_2.2 ; H2.2 53.42,40.315 v1(53.42,46.66)
  Bottom Layer 1 w0.508: v1(32.5,46.64) 38.1,46.64 v1(38.2,46.74) 53.34,46.74 v1(53.42,46.66)
NetH2_3: H2.3 SC_2.1 T3.D | length 57.5
  Top w0.508: T3.D 21.643,36.186 21.643,37.783 v1(21.66,37.8) ; v1(29.86,43.82) 29.86,48.402 30.158,48.7 v1(35.32,48.7) 35.462,48.7 35.76,48.998 35.76,56.182 SC_2.1 SC_2.1@35.7,56.188 ; H2.3 50.778,48.618 v1(50.84,48.68)
  Bottom Layer 1 w0.508: v1(21.66,37.8) 26.202,37.8 26.5,38.098 26.5,43.522 26.798,43.82 v1(29.86,43.82) ; v1(35.32,48.7) 35.34,48.68 v1(50.84,48.68)
NetH2_4: H2.4 SC_1.2 T4.D | length 45.2
  Top w0.508: T4.D@21.657,44.975 21.66,44.978 21.66,45.822 21.958,46.12 25.402,46.12 25.7,46.418 25.7,56.175 SC_1.2 ; v1(48.213,47.86) 48.238,47.835 H2.4
  Bottom Layer 1 w0.508: v1(25.64,47.86) v1(48.213,47.86)
NetOutput_Lio_02: Output_Lio.02 R11.1 | length 104.6
  Top w0.254: v1(66.72,2) 66.72,5.627 R11.1
  Bottom Layer 1 w0.254: Output_Lio.02 1.6,28.68 1.6,1.569 1.749,1.42 66.14,1.42 v1(66.72,2)
NetOutput_Lio_03: Output_Lio.03 R6.1 | length 49
  Top w0.254: Output_Lio.03 9.46,35.2 v1(9.46,31.2) ; v1(28.648,27.76) 28.648,17.986 28.58,17.918 28.58,8.238 28.729,8.089 R6.1
  Bottom Layer 1 w0.254: v1(9.46,31.2) 25.028,31.2 25.279,30.949 25.459,30.949 v1(28.648,27.76)
NetOutput_Lio_04: Output_Lio.04 R1.1 | length 31.8
  Top w0.254: R1.1 3.582,11.66 2.409,11.66 1.829,12.24 1.829,33.909 Output_Lio.04
NetOutput_Lio_05: Output_Lio.05 R22.2 | length 11.5
  Top w0.254: v1(16.74,40.06) 18.127,40.06 R22.2
  Bottom Layer 1 w0.254: Output_Lio.05 14.68,42.12 v1(16.74,40.06)
NetOutput_Lio_06: Output_Lio.06 R20.1 | length 22.8
  Top w0.254: Output_Lio.06 9.031,44.62 10.225,43.426 v1(10.225,31.953) ; v1(16.5,31.956) 16.594,31.956 16.99,31.56 R20.1
  Bottom Layer 1 w0.254: v1(10.225,31.953) 10.227,31.955 16.498,31.955 v1(16.5,31.956)
NetOutput_Lio_07: Output_Lio.07 R18.2 | length 28.3
  Top w0.254: v1(26.92,46.96) 26.92,40.294 27.209,40.005 R18.2
  Bottom Layer 1 w0.254: Output_Lio.07 7.634,47.026 26.854,47.026 v1(26.92,46.96)
NetOutput_Lio_08: Output_Lio.08 R16.1 | length 36.8
  Top w0.254: Output_Lio.08 7.54,49.414 11.1,45.854 v1(11.1,32.74) ; v1(26.82,31.62) 28.962,31.62 R16.1
  Bottom Layer 1 w0.254: v1(11.1,32.74) 16.872,32.74 17.243,32.369 20.006,32.369 20.127,32.248 23.094,32.248 23.159,32.313 26.127,32.313 v1(26.82,31.62)
NetR1_2: R1.2 R2.1 V_R_5V_out.2 | length 6.3
  Top w0.254: R1.2 6.789,11.7 ; R2.1 6.36,13.8 6.64,13.52 6.64,11.849 6.789,11.7 ; 8.118,12.6 8.118,12.313 7.991,12.186 7.991,11.9 7.791,11.7 6.789,11.7
NetR3_1: R3.1 R4.2 V_R_5V_out.8 | length 8.9
  Top w0.254: R4.2 6.46,18.59 ; R3.1 5.636,21.04 6.311,21.04 6.46,20.891 6.46,18.59 ; V_R_5V_out.8@7.603,14.62 7.603,15.451 6.46,16.594 6.46,18.59
NetR4_1: R4.1 R5.2 | length 3.8
  Top w0.254: R5.2 2.609,16.28 2.46,16.429 2.46,18.441 2.609,18.59 R4.1
NetR6_2: R6.2 R7.1 V_R_3.3V_out.2 | length 6.8
  Top w0.152: R7.1 33.572,10.2 35.774,12.402 35.774,12.839 V_R_3.3V_out.2
  Top w0.254: R7.1 32.546,10.192 R6.2
NetR8_1: R8.1 R9.2 V_R_3.3V_out.8 | length 7.3
  Top w0.152: 35.253,15.387 35.312,15.328
  Top w0.202: V_R_3.3V_out.8 35.312,15.328
  Top w0.254: R9.2 34.373,17.233 34.4,17.26 ; R8.1 34.251,19.646 34.4,19.497 34.4,17.26 ; 35.253,15.387 34.4,16.24 34.4,17.26
NetR9_1: R9.1 R10.2 | length 4.4
  Top w0.254: R10.2 30.589,14.82 30.44,14.969 30.44,17.084 30.589,17.233 R9.1
NetR11_2: R11.2 R12.1 V_R_12V_out.2 | length 8.4
  Top w0.152: V_R_12V_out.2 62.854,11.137 62.915,11.076 64.362,9.629 64.362,8.571
  Top w0.254: R12.1 64.362,8.571 64.511,8.72 66.626,8.72 66.775,8.571 R11.2
NetR13_1: R13.1 R14.2 V_R_12V_out.8 | length 8.3
  Top w0.152: 57.498,8.78 57.938,8.78 59.795,10.637 V_R_12V_out.8
  Top w0.254: R13.1 55.234,8.631 55.383,8.78 57.498,8.78 57.647,8.631 R14.2
NetR14_1: R14.1 R15.2 | length 4.5
  Top w0.254: R14.1 57.647,4.669 57.796,4.52 59.911,4.52 60.06,4.669 R15.2
NetR16_2: R16.2 R17.2 T1.G | length 5.7
  Top w0.254: R16.2 32.28,31.56 ; T1.G@31.563,34.004 31.563,33.009 31.712,32.86 32.131,32.86 32.28,32.711 32.28,31.56 ; R17.2 32.28,31.56
NetR18_1: R18.1 R19.1 T2.G | length 5.6
  Top w0.254: R18.1 32.18,40.005 ; T2.G@31.563,42.625 31.48,42.542 31.52,42.502 31.52,41.42 31.66,41.28 32.031,41.28 32.18,41.131 32.18,40.005 ; R19.1 32.18,40.005
NetR20_2: R20.2 R21.2 T3.G | length 5.2
  Top w0.254: R20.2 21.37,31.56 ; T3.G@20.707,34.004 20.66,33.957 20.66,33.02 21.37,32.31 21.37,31.56 ; R21.2 21.37,31.56
NetR22_1: R22.1 R23.1 T4.G | length 5.4
  Top w0.254: R22.1 21.22,40.005 ; T4.G@20.707,42.625 20.707,41.689 20.856,41.54 21.071,41.54 21.22,41.391 21.22,40.005 ; R23.1 21.22,40.005
V_Batterie: C1.1 C2.1 C3.1 C9.1 C10.1 C11.1 C17.1 C18.1 C19.1 D1.K D2.K D3.K Fuse.1 V_R_3.3V_out.3 V_R_5V_out.3 V_R_12V_out.3 | length 66.4
  Top w0.254: 8.626,11.7 V_R_5V_out.3 ; C3.1 12.14,10.5 ; C1.1 v1(15.3,4.22) ; C2.1 13.34,7.66 13.36,7.68 ; Fuse.1 14.845,30.075 15.26,29.66 v1@15.26,29.58 ; v1@34.3,4.32 C9.1 ; 34.318,8.1 C10.1 ; 36.312,10.892 37.026,10.892 C11.1 ; 36.312,11.8 V_R_3.3V_out.3 ; V_R_12V_out.3 63.18,11.637 ; 64.12,11.629 64.2,11.709 C19.1 ; C18.1 66.72,11.255 v1(66.72,9.68) ; v1(70.26,9.682) 70.26,11.243 C17.1
  Top w0.508: 8.626,11.7 11.84,11.7 12.14,11.4 12.14,10.5 13.36,9.28 13.36,7.68 13.38,7.66 v1(15.3,7.66) ; v1@34.3,4.32 v1(34.28,4.34) 34.28,8.138 ; 34.318,8.1 34.28,8.138 ; 36.312,11.8 36.312,10.892 36.2,10.78 35.06,10.78 34.28,10 34.28,8.138 ; 63.18,11.637 64.112,11.637 64.12,11.629 64.12,10.96 65.4,9.68 v1(66.72,9.68) ; C19.1@64.12,12.298 C19.1
  Top w1.016: D2.K v1(15.3,27.24) ; D1.K 12.955,24.9 v1(15.22,24.9) ; D3.K v1@15.26,29.58 ; C9.1@35.61,4.34 C9.1
  other v1: 15.3,29.62
pads on no net: Input_Lio.01 Input_Lio.02 Input_Lio.03 Input_Lio.04 Output_Lio.01 V_R_3.3V_out.1 V_R_5V_out.1

## Polygon pours and split planes (outlines as drawn)
GND on Layer 3 "GND" (solid, remove dead copper, pour order 7): 0,57.86 0.08,57.94 74.96,57.94 74.96,0.04 74.94,0.02 0,0.02
V_Batterie on Layer 3 "V_Batterie" (solid, pour order 0): 14.24,30.26 14.24,21.16 14.24,2.809 68.649,2.809 68.68,2.84 68.66,2.86 68.66,8.48 71.64,8.48 71.52,8.6 71.52,10.32 66.44,10.32 66.32,10.2 66.32,4.84 16.42,4.84 16.42,30.26
NetBC_1 on Layer 3 "V_Connector" (solid, pour order 1): 7.477,30.12 9.28,30.12 9.28,22.615 9.28,22.24 7.544,22.24
GND on Layer 2 "GND" (solid, remove dead copper, pour order 2): 0.02,57.88 0.1,57.96 74.98,57.96 74.98,0.06 74.96,0.04 0.02,0.04
GND on Bottom Layer 1 "GND" (solid, remove dead copper, pour order 8): 0.08,57.92 0.16,58 75.04,58 75.04,0.1 75.02,0.08 0.08,0.08
GND on Top "GND" (solid, remove dead copper, pour order 3): 0.14,57.78 0.22,57.86 75.1,57.86 75.1,-0.04 75.08,-0.06 0.14,-0.06

## Keep-outs
Keep-Out Layer:
  lines w0.508: 0,57.98 0.02,57.96 0.02,0.04 74.96,0.04 74.94,0.06 74.94,57.96 74.92,57.98 0,57.98

## Silkscreen, mask and mechanical layers (free items; w line width, h text height)
Top Overlay:
  drawing of 23 lines, arcs and shapes, not listed
  text "3.3V" at 44.086,42.094 h1.52 r90
  text "12V" at 46.666,42.094 h1.52 r90
  text "GND" at 38.926,42.014 h1.52 r90
  text "5V" at 41.546,42.014 h1.52 r90
  text "DO3-" at 51.766,41.974 h1.52 r90
  text "DO1-" at 56.886,41.994 h1.52 r90
  text "DO4-" at 49.246,41.954 h1.52 r90
  text "DO2-" at 54.346,41.954 h1.52 r90
  text "5V" at 41.546,32.474 h1.52 r90
  text "DI4" at 49.186,31.234 h1.52 r90
  text "DI3" at 51.806,31.234 h1.52 r90
  text "DI2" at 54.366,31.234 h1.52 r90
  text "DI1" at 56.946,31.234 h1.52 r90
  text "12V" at 46.646,31.194 h1.52 r90
  text "GND" at 38.906,30.894 h1.52 r90
  text "3.3V" at 44.146,29.694 h1.52 r90
  text "Electric Interface Lio / Designer: Yan Gridling / Date: 28.05.2024 / Version: 1.2" at 30.72,21.32 h0.57
Bottom Overlay:
  text "DO1" at 10.553,48.367 h0.76
  text "-" at 16.714,48.367 h0.76 r90
  text "-" at 19.269,48.367 h0.76 r90
  text "+" at 10.987,48.24 h0.76
  text "+" at 13.547,48.24 h0.76
  text "DO2" at 10.893,46.687 h0.76
  text "DO3" at 10.893,44.287 h0.76
  text "DO4" at 10.893,41.787 h0.76
  text "DO5" at 10.893,39.267 h0.76
  text "DO6" at 10.893,36.707 h0.76
  text "DI4" at 65.833,36.007 h0.76
  text "DO7" at 10.893,34.232 h0.76
  text "DI3" at 65.833,33.472 h0.76
  text "DI2" at 65.833,30.987 h0.76
  text "DI1" at 65.833,28.547 h0.76
  text "V_Batterie" at 21.473,22.394 h0.76
  text "GND" at 16.773,19.447 h0.76